# EAGLE board CT_schematic (EAGLE 7.6.0)

Size 100 x 80 mm. Coordinates in mm from the lower left corner, seen from the top.
Outline: 0,0 100,0 100,80 0,80 0,0
Copper layers (1*16): Top 0.035mm / dielectric 1.5mm / Bottom 0.035mm
Design rules "default": minimum track width 10mil, minimum drill 24mil, track to track 8mil, track to pad 8mil, pad to pad 8mil, via to via 8mil, smd to smd 8mil, copper to edge 40mil, drill to drill 8mil, minimum pad ring 10mil, minimum via ring 8mil, stop-mask expansion 4mil, vias tented up to drill 0mil, thermal gap 10mil

## Footprints (pad centres in the part's own frame; a part is rotated, then mirrored left to right if it is on the bottom)
C0603 = smd 0.8 x 0.8: 1 -0.762,0; 2 0.762,0
C0402 = smd 0.5 x 0.5: 1 -0.508,0; 2 0.508,0
C0805 = smd 1.2 x 1.3: 1 -1.016,0; 2 1.016,0
C1206 = smd 1.3 x 1.6: 1 -1.524,0; 2 1.524,0
C1210 = smd 1.2 x 2.5: 1 -1.524,0; 2 1.524,0
EXV-9H = smd 3.505 x 1.676: 1 -2.857,0; 2 2.857,0
L0603 = smd 0.8 x 0.8: 1 -0.762,0; 2 0.762,0
R0603 = smd 0.8 x 0.8: 1 -0.762,0; 2 0.762,0
L1210 = smd 1.2 x 2.5: 1 -1.524,0; 2 1.524,0
WE-HCI_7030/7040/7050 = smd 2.5 x 3: 1 -2.45,0; 2 2.45,0
PJ-037B_PACKAGE = drill 3.7 square: 1 12,0 | drill 3.2 square: 2 6,0
LQFP144 = smd 0.35 x 1.35: 1 -8.75,-10.625; 2 -8.25,-10.625; 3 -7.75,-10.625; 4 -7.25,-10.625; 5 -6.75,-10.625; 6 -6.25,-10.625; 7 -5.75,-10.625; 8 -5.25,-10.625; 9 -4.75,-10.625; 10 -4.25,-10.625; 11 -3.75,-10.625; 12 -3.25,-10.625; 13 -2.75,-10.62; 14 -2.25,-10.625; 15 -1.75,-10.625; 16 -1.25,-10.625; 17 -0.75,-10.625; 18 -0.25,-10.625; 19 0.25,-10.625; 20 0.75,-10.625; 21 1.25,-10.625; 22 1.75,-10.625; 23 2.25,-10.625; 24 2.75,-10.62; 25 3.25,-10.625; 26 3.75,-10.625; 27 4.25,-10.625; 28 4.75,-10.625; 29 5.25,-10.625; 30 5.75,-10.625; 31 6.25,-10.625; 32 6.75,-10.625; 33 7.25,-10.625; 34 7.75,-10.625; 35 8.25,-10.625; 36 8.75,-10.625; 73 8.75,10.625; 74 8.25,10.625; 75 7.75,10.625; 76 7.25,10.625; 77 6.75,10.625; 78 6.25,10.625; 79 5.75,10.625; 80 5.25,10.625; 81 4.75,10.625; 82 4.25,10.625; 83 3.75,10.625; 84 3.25,10.625; 85 2.75,10.625; 86 2.25,10.625; 87 1.75,10.625; 88 1.25,10.625; 89 0.75,10.625; 90 0.25,10.625; 91 -0.25,10.625; 92 -0.75,10.625; 93 -1.25,10.625; 94 -1.75,10.625; 95 -2.25,10.625; 96 -2.75,10.625; 97 -3.25,10.625; 98 -3.75,10.625; 99 -4.25,10.625; 100 -4.75,10.625; 101 -5.25,10.625; 102 -5.75,10.625; 103 -6.25,10.625; 104 -6.75,10.625; 105 -7.25,10.625; 106 -7.75,10.625; 107 -8.25,10.625; 108 -8.75,10.625 | smd 1.35 x 0.35: 37 10.625,-8.75; 38 10.625,-8.25; 39 10.625,-7.75; 40 10.625,-7.25; 41 10.625,-6.75; 42 10.625,-6.25; 43 10.625,-5.75; 44 10.625,-5.25; 45 10.625,-4.75; 46 10.625,-4.25; 47 10.625,-3.75; 48 10.625,-3.25; 49 10.625,-2.75; 50 10.625,-2.25; 51 10.625,-1.75; 52 10.625,-1.25; 53 10.625,-0.75; 54 10.625,-0.25; 55 10.625,0.25; 56 10.625,0.75; 57 10.625,1.25; 58 10.625,1.75; 59 10.625,2.25; 60 10.625,2.75; 61 10.625,3.25; 62 10.625,3.75; 63 10.625,4.25; 64 10.625,4.75; 65 10.625,5.25; 66 10.625,5.75; 67 10.625,6.25; 68 10.625,6.75; 69 10.625,7.25; 70 10.625,7.75; 71 10.625,8.25; 72 10.625,8.75; 109 -10.625,8.75; 110 -10.625,8.25; 111 -10.625,7.75; 112 -10.625,7.25; 113 -10.625,6.75; 114 -10.625,6.25; 115 -10.625,5.75; 116 -10.625,5.25; 117 -10.625,4.75; 118 -10.625,4.25; 119 -10.625,3.75; 120 -10.625,3.25; 121 -10.625,2.75; 122 -10.625,2.25; 123 -10.625,1.75; 124 -10.625,1.25; 125 -10.625,0.75; 126 -10.625,0.25; 127 -10.625,-0.25; 128 -10.625,-0.75; 129 -10.625,-1.25; 130 -10.625,-1.75; 131 -10.625,-2.25; 132 -10.625,-2.75; 133 -10.625,-3.25; 134 -10.625,-3.75; 135 -10.625,-4.25; 136 -10.625,-4.75; 137 -10.625,-5.25; 138 -10.625,-5.75; 139 -10.625,-6.25; 140 -10.625,-6.75; 141 -10.625,-7.25; 142 -10.625,-7.75; 143 -10.625,-8.25; 144 -10.625,-8.75
A2500R24A00GM = smd 1.5 x 0.61: 1 -3,7; 2 -3,6; 3 -3,5; 4 -3,4; 5 -3,3; 6 -3,2; 7 -3,1; 8 -3,0; 17 5.22,0; 18 5.22,1; 19 5.22,2; 20 5.22,3; 21 5.22,4; 22 5.22,5; 23 5.22,6; 24 5.22,7 | smd 0.61 x 1.5: 9 -2.39,-1.6; 10 -1.39,-1.6; 11 -0.39,-1.6; 12 0.61,-1.6; 13 1.61,-1.6; 14 2.61,-1.6; 15 3.61,-1.6; 16 4.61,-1.6 | smd 1 x 1: 25 -2.8,9; 26 -2.8,13; 27 5.02,9; 28 5.02,13; 29 0.11,5.75; 30 2.11,5.75
QFN-32 = smd 0.6 x 0.3: 1 -2.3,1.75; 2 -2.3,1.25; 3 -2.3,0.75; 4 -2.3,0.25; 5 -2.3,-0.25; 6 -2.3,-0.75; 7 -2.3,-1.25; 8 -2.3,-1.75; 17 2.3,-1.75; 18 2.3,-1.25; 19 2.3,-0.75; 20 2.3,-0.25; 21 2.3,0.25; 22 2.3,0.75; 23 2.3,1.25; 24 2.3,1.75 | smd 0.3 x 0.6: 9 -1.75,-2.3; 10 -1.25,-2.3; 11 -0.75,-2.3; 12 -0.25,-2.3; 13 0.25,-2.3; 14 0.75,-2.3; 15 1.25,-2.3; 16 1.75,-2.3; 25 1.75,2.3; 26 1.25,2.3; 27 0.75,2.3; 28 0.25,2.3; 29 -0.25,2.3; 30 -0.75,2.3; 31 -1.25,2.3; 32 -1.75,2.3 | smd 3.2 x 3.2: EXP 0,0
7498011122R = smd 0.71 x 2.29: 1 -3.545,-3.18; 2 -2.525,-3.18; 3 -1.505,-3.18; 4 -0.485,-3.18; 5 0.535,-3.18; 6 1.555,-3.18; 8 3.595,-3.18; 9 5.635,-3.18; 10 6.655,-3.18; 11 -6.605,-3.18; 12 -5.585,-3.18 | smd 1.4 x 2.54: 13 -8.51,10.2; 14 8.51,10.2 | hole 1.4: -3.5,0; 3.5,0
AT24C02D = smd 1.6 x 0.6: 1 -2.475,1.905 | smd 1.55 x 0.6: 2 -2.475,0.635; 3 -2.475,-0.635; 4 -2.475,-1.905; 5 2.475,-1.905; 6 2.475,-0.635; 7 2.475,0.635; 8 2.475,1.905
SSOP-20 = smd 1.651 x 0.432: 1 -3.48,2.925; 2 -3.48,2.275; 3 -3.48,1.625; 4 -3.48,0.975; 5 -3.48,0.325; 6 -3.48,-0.325; 7 -3.48,-0.975; 8 -3.48,-1.625; 9 -3.48,-2.275; 10 -3.48,-2.925; 11 3.48,-2.925; 12 3.48,-2.275; 13 3.48,-1.625; 14 3.48,-0.975; 15 3.48,-0.325; 16 3.48,0.325; 17 3.48,0.975; 18 3.48,1.625; 19 3.48,2.275; 20 3.48,2.925
182-009-MALE = drill 1.194 pad 1.524 octagon: 1 -5.537,10.923; 2 -2.769,10.923; 3 0,10.923; 4 2.769,10.923; 5 5.537,10.923; 6 -4.153,8.08; 7 -1.384,8.08; 8 1.384,8.08; 9 4.153,8.08 | hole 3.048: -12.446,9.501; 12.446,9.501
SJ-43515TS-SMT-TR = smd 2.2 x 3: 1 0.6,-7.4; 4 3.4,-7.4 | smd 3 x 3: 2 12.8,-7.4; 5 17,-3 | smd 2 x 3: 3 5.3,0; 6 2.5,0 | drill 1.8: P$7 4.5,-3.69; P$8 11.54,-3.69
WM-64PC = drill 0.6 pad 1: 1 -1,0.95; 2 -1,-0.95
ABS07-32.768KHZ-7-T = smd 1.1 x 2.4: 1 -2.5,0; 2 0,0
ABLS-25.000MHZ-B2F-T = smd 5.6 x 2.8: 1 -3.81,0; 2 5.69,0
ASFL1 = smd 1.7 x 1.5: 1 -1.27,-1.1; 2 1.27,-1.1; 3 1.27,1.1; 4 -1.27,1.1
WSON-8 = smd 0.3 x 0.6: 1 -0.75,0; 2 0.05,0; 3 0.85,0; 4 1.65,0; 5 1.65,3.8; 6 0.85,3.8; 7 0.05,3.8; 8 -0.75,3.8 | smd 3 x 2.6: PAD 0.45,1.9
HTSSOP14 = smd 1.676 x 0.356: 1 -2.8,1.95; 2 -2.8,1.3; 3 -2.8,0.65; 4 -2.8,0; 5 -2.8,-0.65; 6 -2.8,-1.3; 7 -2.8,-1.95; 8 2.8,-1.95; 9 2.8,-1.3; 10 2.8,-0.65; 11 2.8,0; 12 2.8,0.65; 13 2.8,1.3; 14 2.8,1.95 | smd 3 x 5: 15 0,0 | drill 0.4 pad 0.45: P$1 -0.75,1.5; P$2 0.75,1.5; P$3 -0.75,0; P$4 0.8,0; P$5 -0.75,-1.5; P$6 0.9,-1.5
SON-6 = smd 0.55 x 0.3: 1 -0.355,0.5 | smd 0.52 x 0.3: 2 -0.37,0; 3 -0.37,-0.5; 4 0.37,-0.5; 5 0.37,0; 6 0.37,0.5
SW_4-1437565-2 = smd 1.4 x 2.1: 1 -2.23,4.55; 2 -2.23,-4.55; 3 2.23,4.55; 4 2.23,-4.55
LGM67K-G1J2-24-Z = smd 0.8 x 1.4: A -2,0; C 0,0
NC7SZ125M5X = smd 1.3 x 0.7: 1 -1.3,0.95; 2 -1.3,0; 3 -1.3,-0.95; 4 1.3,-0.95; 5 1.3,0.95

## Placement (x,y rotation side)
C1  1e-06  [C0603]  -15.24,107.95 0 top  (outside the outline)
C2  1e-07  [C0603]  -19.05,107.95 0 top  (outside the outline)
C3  1e-07  [C0603]  -22.86,107.95 0 top  (outside the outline)
C4  1e-07  [C0603]  -26.67,107.95 0 top  (outside the outline)
C5  1e-07  [C0603]  -30.48,107.95 0 top  (outside the outline)
C6  1e-07  [C0603]  -34.29,107.95 0 top  (outside the outline)
C7  1e-07  [C0603]  -38.1,107.95 0 top  (outside the outline)
C8  1e-07  [C0603]  -41.91,107.95 0 top  (outside the outline)
C9  1e-07  [C0603]  -45.72,107.95 0 top  (outside the outline)
C10  1e-07  [C0603]  -49.53,107.95 0 top  (outside the outline)
C11  1e-07  [C0603]  -53.34,107.95 0 top  (outside the outline)
C12  1e-07  [C0603]  -57.15,107.95 0 top  (outside the outline)
C13  1e-07  [C0603]  -60.96,107.95 0 top  (outside the outline)
C14  4.7e-06  [C0603]  -90.17,102.87 0 top  (outside the outline)
C15  2.2e-06  [C0603]  -93.98,102.87 0 top  (outside the outline)
C16  2.2e-06  [C0603]  -97.79,102.87 0 top  (outside the outline)
C17  1e-08  [C0603]  -64.77,107.95 0 top  (outside the outline)
C18  1e-06  [C0603]  -68.58,107.95 0 top  (outside the outline)
C19  1e-11  [C0402]  -46.99,118.11 0 top  (outside the outline)
C20  1e-11  [C0402]  -50.8,118.11 0 top  (outside the outline)
C21  1e-11  [C0402]  -54.61,118.11 0 top  (outside the outline)
C22  1e-11  [C0402]  -58.42,118.11 0 top  (outside the outline)
C23  1e-05  [C0805]  -27.94,96.52 0 top  (outside the outline)
C24  2.2e-08  [C0402]  -39.37,118.11 0 top  (outside the outline)
C25  1e-06  [C0603]  -72.39,107.95 0 top  (outside the outline)
C26  1e-06  [C0603]  -76.2,107.95 0 top  (outside the outline)
C27  4.7e-10  [C0603]  -101.6,102.87 0 top  (outside the outline)
C28  1e-06  [C0603]  -80.01,107.95 0 top  (outside the outline)
C29  1e-11  [C0402]  -62.23,118.11 0 top  (outside the outline)
C30  1e-11  [C0402]  -66.04,118.11 0 top  (outside the outline)
C31  1e-08  [C0402]  -69.85,118.11 0 top  (outside the outline)
C32  1e-06  [C0603]  -83.82,107.95 0 top  (outside the outline)
C33  1e-06  [C0603]  -87.63,107.95 0 top  (outside the outline)
C34  1e-06  [C0603]  -91.44,107.95 0 top  (outside the outline)
C35  4.7e-06  [C0805]  -33.02,96.52 0 top  (outside the outline)
C36  1e-06  [C0603]  -95.25,107.95 0 top  (outside the outline)
C37  1e-06  [C0603]  -99.06,107.95 0 top  (outside the outline)
C38  1e-06  [C0603]  -15.24,113.03 0 top  (outside the outline)
C39  1e-06  [C0603]  -19.05,113.03 0 top  (outside the outline)
C40  1e-06  [C0603]  -22.86,113.03 0 top  (outside the outline)
C41  1e-06  [C0603]  -26.67,113.03 0 top  (outside the outline)
C42  1e-06  [C0603]  -30.48,113.03 0 top  (outside the outline)
C43  1e-07  [C0402]  -73.66,118.11 0 top  (outside the outline)
C44  1e-07  [C0402]  -77.47,118.11 0 top  (outside the outline)
C45  1e-07  [C0402]  -81.28,118.11 0 top  (outside the outline)
C46  1e-07  [C0402]  -85.09,118.11 0 top  (outside the outline)
C47  1e-06  [C0603]  -34.29,113.03 0 top  (outside the outline)
C48  1e-08  [C0402]  -88.9,118.11 0 top  (outside the outline)
C49  1e-08  [C0402]  -92.71,118.11 0 top  (outside the outline)
C50  1e-05  [C1206]  -97.79,88.9 0 top  (outside the outline)
C51  1e-05  [C0805]  -38.1,96.52 0 top  (outside the outline)
C52  1e-06  [C0603]  -38.1,113.03 0 top  (outside the outline)
C53  3.3e-09  [C0402]  -43.18,118.11 0 top  (outside the outline)
C54  1e-07  [C0402]  -96.52,118.11 0 top  (outside the outline)
C55  2.2e-05  [C1210]  -78.74,90.17 0 top  (outside the outline)
C56  2.2e-05  [C1210]  -85.09,90.17 0 top  (outside the outline)
C57  1e-05  [C0805]  -43.18,96.52 0 top  (outside the outline)
C58  1e-05  [C0805]  -48.26,96.52 0 top  (outside the outline)
C59  1e-07  [C0402]  -100.33,118.11 0 top  (outside the outline)
C60  0.0001  [EXV-9H]  -57.15,81.28 0 top  (outside the outline)
C61  0.0001  [EXV-9H]  -68.58,81.28 0 top  (outside the outline)
C62  1e-08  [C0402]  -15.24,123.19 0 top  (outside the outline)
C63  1e-08  [C0402]  -19.05,123.19 0 top  (outside the outline)
F1  240.0  [L0603]  -41.91,113.03 0 top  (outside the outline)
I1  97.0  [R0603]  -45.72,113.03 0 top  (outside the outline)
I5  1.5e-05  [L1210]  -91.44,90.17 0 top  (outside the outline)
I6  3.3e-06  [WE-HCI_7030/7040/7050]  -88.9,55.88 0 top  (outside the outline)
J1  PJ-037B  [PJ-037B_PACKAGE]  -83.82,57.15 0 top  (outside the outline)
R2  1000.0  [R0603]  -49.53,113.03 0 top  (outside the outline)
R4  4700.0  [R0603]  -53.34,113.03 0 top  (outside the outline)
R5  4700.0  [R0603]  -57.15,113.03 0 top  (outside the outline)
R6  2200.0  [R0603]  -60.96,113.03 0 top  (outside the outline)
R7  2200.0  [R0603]  -64.77,113.03 0 top  (outside the outline)
R8  2200.0  [R0603]  -68.58,113.03 0 top  (outside the outline)
R9  2200.0  [R0603]  -72.39,113.03 0 top  (outside the outline)
R10  10000.0  [R0603]  -92.71,96.52 0 top  (outside the outline)
R11  0.1  [R0603]  -76.2,113.03 0 top  (outside the outline)
R12  0.1  [R0603]  -80.01,113.03 0 top  (outside the outline)
R13  200.0  [R0603]  -83.82,113.03 0 top  (outside the outline)
R14  200.0  [R0603]  -87.63,113.03 0 top  (outside the outline)
R15  12100.0  [R0603]  -97.79,96.52 0 top  (outside the outline)
R16  49.9  [R0603]  -91.44,113.03 0 top  (outside the outline)
R17  49.9  [R0603]  -95.25,113.03 0 top  (outside the outline)
R18  49.9  [R0603]  -99.06,113.03 0 top  (outside the outline)
R19  10000.0  [R0603]  -15.24,102.87 0 top  (outside the outline)
R20  49.9  [R0603]  -15.24,118.11 0 top  (outside the outline)
R21  10000.0  [R0603]  -20.32,102.87 0 top  (outside the outline)
R22  10000.0  [R0603]  -25.4,102.87 0 top  (outside the outline)
R23  10000.0  [R0603]  -30.48,102.87 0 top  (outside the outline)
R24  10000.0  [R0603]  -35.56,102.87 0 top  (outside the outline)
R25  10000.0  [R0603]  -40.64,102.87 0 top  (outside the outline)
R26  10000.0  [R0603]  -45.72,102.87 0 top  (outside the outline)
R27  10000.0  [R0603]  -50.8,102.87 0 top  (outside the outline)
R28  10000.0  [R0603]  -55.88,102.87 0 top  (outside the outline)
R29  10000.0  [R0603]  -60.96,102.87 0 top  (outside the outline)
R30  10000.0  [R0603]  -66.04,102.87 0 top  (outside the outline)
R31  10000.0  [R0603]  -71.12,102.87 0 top  (outside the outline)
R32  100000.0  [R0603]  -62.23,96.52 0 top  (outside the outline)
R33  100000.0  [R0603]  -67.31,96.52 0 top  (outside the outline)
R34  100000.0  [R0603]  -72.39,96.52 0 top  (outside the outline)
R35  1270.0  [R0603]  -19.05,118.11 0 top  (outside the outline)
R36  1270.0  [R0603]  -22.86,118.11 0 top  (outside the outline)
R37  100000.0  [R0603]  -77.47,96.52 0 top  (outside the outline)
R38  200.0  [R0603]  -26.67,118.11 0 top  (outside the outline)
R39  1000.0  [R0603]  -30.48,118.11 0 top  (outside the outline)
R40  71007.101651032  [R0603]  -57.15,96.52 0 top  (outside the outline)
R41  22000.0  [R0603]  -76.2,102.87 0 top  (outside the outline)
R42  10000.0  [R0603]  -81.28,102.87 0 top  (outside the outline)
R43  10000.0  [R0603]  -86.36,102.87 0 top  (outside the outline)
R44  9100.0  [R0603]  -34.29,118.11 0 top  (outside the outline)
R45  680000.0  [R0603]  -82.55,96.52 0 top  (outside the outline)
R46  120000.0  [R0603]  -87.63,96.52 0 top  (outside the outline)
U1  STM32F207ZET6  [LQFP144]  -64.77,11.43 0 top  (outside the outline)
U2  A2500R24A00GM  [A2500R24A00GM]  -46.99,7.62 0 top  (outside the outline)
U3  LAN8710AI-EZK  [QFN-32]  -67.31,69.85 0 top  (outside the outline)
U4  7498011122R  [7498011122R]  -22.86,7.62 0 top  (outside the outline)
U5  AT24C02D-SSHM-T  [AT24C02D]  -85.09,69.85 0 top  (outside the outline)
U6  MAX3218EAP+T  [SSOP-20]  -95.25,68.58 0 top  (outside the outline)
U7  182-009-113R531  [182-009-MALE]  -36.83,34.29 0 top  (outside the outline)
U8  SGTL5000XNAA3  [QFN-32]  -53.34,69.85 0 top  (outside the outline)
U9  SJ-43515TS-SMT-TR  [SJ-43515TS-SMT-TR]  -78.74,38.1 0 top  (outside the outline)
U10  SJ-43515TS-SMT-TR  [SJ-43515TS-SMT-TR]  -39.37,59.69 0 top  (outside the outline)
U11  SJ-43515TS-SMT-TR  [SJ-43515TS-SMT-TR]  -67.31,59.69 0 top  (outside the outline)
U12  WM-64PCT  [WM-64PC]  -39.37,69.85 0 top  (outside the outline)
U13  ABS07-32.768KHZ-7-T  [ABS07-32.768KHZ-7-T]  -49.53,90.17 0 top  (outside the outline)
U14  ABLS-25.000MHZ-B2F-T  [ABLS-25.000MHZ-B2F-T]  -87.63,81.28 0 top  (outside the outline)
U15  ABLS-25.000MHZ-B2F-T  [ABLS-25.000MHZ-B2F-T]  -26.67,90.17 0 top  (outside the outline)
U16  ASFL-24.57MHZ-NCS  [ASFL1]  -48.26,81.28 0 top  (outside the outline)
U17  LP3878SDX-ADJ/NOPB  [WSON-8]  -30.48,80.01 0 top  (outside the outline)
U18  tps54325PWP  [HTSSOP14]  -58.42,90.17 0 top  (outside the outline)
U19  TPS3895ADRYR  [SON-6]  -21.59,121.92 0 top  (outside the outline)
U20  4-1437565-2  [SW_4-1437565-2]  -27.94,71.12 0 top  (outside the outline)
U21  Q65110A2395  [LGM67K-G1J2-24-Z]  -67.31,90.17 0 top  (outside the outline)
U22  nc7sz125m5x  [NC7SZ125M5X]  -15.24,96.52 0 top  (outside the outline)
U23  nc7sz125m5x  [NC7SZ125M5X]  -21.59,96.52 0 top  (outside the outline)

## Library data of the parts
C1-C63 F1 I1 I5 I6 J1 R2 R4-R46 U1-U23 = circuit_tree

## Nets
CLK_CRYSTAL_U1_8: C19.1 U1.8 U13.1
CLK_CRYSTAL_U1_9: C20.1 U1.9 U13.2
CLK_CRYSTAL_U1_23: C21.1 U1.23 U14.1
CLK_CRYSTAL_U1_24: C22.1 U1.24 U14.2
CLK_CRYSTAL_U3_4: C30.1 U3.4 U15.2
CLK_CRYSTAL_U3_5: C29.1 U3.5 U15.1
CLK_U8_21: U8.21 U16.3
GND: C1.2 C2.2 C3.2 C4.2 C5.2 C6.2 C7.2 C8.2 C9.2 C10.2 C11.2 C12.2 C13.2 C14.2 C15.2 C16.2 C17.2 C18.2 C19.2 C20.2 C21.2 C22.2 C23.2 C24.2 C25.2 C26.2 C27.2 C28.2 C29.2 C30.2 C31.2 C32.2 C33.2 C34.2 C43.2 C44.2 C45.2 C46.2 C47.2 C48.2 C49.2 C50.2 C51.2 C52.2 C53.2 C55.2 C56.2 C57.2 C58.2 C59.2 C60.2 C61.2 C62.2 C63.2 J1.2 R2.2 R10.2 R11.2 R12.2 R13.2 R15.2 R26.2 R27.2 R28.2 R30.2 R31.2 R36.2 R39.2 R41.2 R44.2 R46.2 U1.16 U1.31 U1.38 U1.51 U1.61 U1.83 U1.94 U1.107 U1.120 U1.130 U2.8 U2.17 U3.EXP U5.4 U6.5 U6.17 U6.20 U7.5 U8.1 U8.3 U8.7 U8.EXP U10.1 U11.1 U12.2 U16.2 U17.3 U17.PAD U18.5 U18.8 U18.9 U18.15 U19.2 U21.C U22.1 U22.3 U23.1 U23.3
NET_U1_25: R5.1 U1.25 U23.4
NET_U1_27: R8.1 U1.27 U3.17
NET_U1_33: C17.1 C18.1 F1.1 U1.32 U1.33
NET_U1_36: R9.1 U1.36 U3.16
NET_U1_71: C15.1 U1.71
NET_U1_106: C16.1 U1.106
NET_U1_136: R6.1 U1.136 U5.6
NET_U1_137: R7.1 U1.137 U5.5
NET_U1_138: R10.1 U1.138
NET_U1_141: U21.A
NET_U1_142: U20.3 U20.4
NET_U3_1: C25.1 I1.1 R16.2 R17.2 R18.2 R20.2 R21.2 U3.1 U3.27 U4.2 U4.9
NET_U3_3: R21.1 U3.3
NET_U3_18: R19.1 U3.18
NET_U3_19: R4.1 U3.19 U22.4
NET_U3_32: R15.1 U3.32
NET_U4_1: R16.1 U3.29 U4.1
NET_U4_3: R14.2 R17.1 U3.28 U4.3
NET_U4_4: R18.1 U3.31 U4.4
NET_U4_5: C24.1 U4.2 U4.5
NET_U4_6: R20.1 U3.30 U4.6
NET_U4_8: R12.1 U4.8
NET_U4_10: R14.1 U4.10
NET_U4_11: U3.2 U4.11
NET_U4_12: R13.1 U4.12
NET_U4_13: R11.1 U4.13 U4.14
NET_U5_1: R29.1 U5.1
NET_U5_2: R30.1 U5.2
NET_U5_3: R31.1 U5.3
NET_U5_7: R28.1 U5.7
NET_U6_1: I5.1 U6.1
NET_U6_2: R32.1 U6.2
NET_U6_3: R33.1 U6.3
NET_U6_4: R34.1 U6.4
NET_U6_15: C34.1 U6.15
NET_U6_16: C35.2 U6.16
NET_U6_18: C35.1 U6.18
NET_U6_19: C33.1 U6.19
NET_U7_2: U6.12 U7.2
NET_U7_3: U6.14 U7.3
NET_U7_7: U6.11 U7.7
NET_U7_8: U6.13 U7.8
NET_U8_10: C46.1 U8.10
NET_U8_29: R35.1 U8.29
NET_U8_31: R36.1 U8.31
NET_U9_1: U8.4 U9.1
NET_U9_2: U8.2 U9.2
NET_U9_5: U8.6 U9.5
NET_U10_2: C37.1 U10.2
NET_U10_5: C36.1 U10.5
NET_U10_11: C37.2
NET_U10_12: C36.2
NET_U11_2: C39.1 C40.1 U11.2
NET_U11_5: C38.1 U11.5
NET_U11_13: C39.2 C40.2
NET_U11_14: C38.2
NET_U12_1: C41.1 C42.1 C47.1 U8.16 U12.1
NET_U12_15: C41.2 C42.2
NET_U17_1: C49.1 U17.1
NET_U17_6: R38.2 R39.1 U17.6
NET_U17_8: R37.1 U17.8
NET_U18_2: R40.2 R41.1 U18.2
NET_U18_3: C52.1 U18.3
NET_U18_4: C53.1 U18.4
NET_U18_10: C54.1 I6.1 U18.10 U18.11
NET_U18_12: C54.2 U18.12
NET_U19_1: R43.1 R44.1 U19.1
NET_U19_3: R45.2 R46.1 U19.3
NET_U19_4: R42.1 U19.4 U22.2 U23.2
NET_U20_1: R2.1 U20.1 U20.2
PROC_ETH_COL: R24.1 U1.37 U3.15
PROC_ETH_CRS: U1.34 U3.14
PROC_ETH_RX_CLK: R26.1 U1.35 U3.7
PROC_ETH_RX_DV: U1.43 U3.26
PROC_ETH_RX_ER: R25.1 U1.69 U3.13
PROC_ETH_RXD0: R22.1 U1.44 U3.11
PROC_ETH_RXD1: R23.1 U1.45 U3.10
PROC_ETH_RXD2: U1.46 U3.9
PROC_ETH_RXD3: R27.1 U1.47 U3.8
PROC_ETH_TX_CLK: U1.29 U3.20
PROC_ETH_TX_EN: U1.70 U3.21
PROC_ETH_TXD0: U1.73 U3.22
PROC_ETH_TXD1: U1.129 U3.23
PROC_ETH_TXD2: U1.28 U3.24
PROC_ETH_TXD3: U1.1 U3.25
PROC_I2S2_SCK: U1.74 U8.24
PROC_I2S2_SD: U1.76 U8.26
PROC_I2S2_WS: U1.140 U8.23
PROC_SPI1_MISO: U1.42 U2.10
PROC_SPI1_MOSI: U1.135 U2.11
PROC_SPI1_NSS: U1.40 U2.12
PROC_SPI1_SCK: U1.41 U2.9
PROC_UART4_RX: U1.112 U6.9
PROC_UART4_TX: U1.111 U6.7
VCC_S1_6V1: C50.1 C57.1 C58.1 C60.1 C61.1 J1.1 R37.2 U17.4 U18.7 U18.13 U18.14
VCC_TIER1_1V2: C26.1 C27.1 C43.1 C51.1 R38.1 U3.6 U8.30 U17.5
VCC_TIER1_3V3: C1.1 C2.1 C3.1 C4.1 C5.1 C6.1 C7.1 C8.1 C9.1 C10.1 C11.1 C12.1 C13.1 C14.1 C23.1 C28.1 C31.1 C32.1 C44.1 C45.1 C48.1 C55.1 C56.1 C59.1 C62.1 C63.1 F1.2 I1.2 I5.2 I6.2 R4.2 R5.2 R6.2 R7.2 R8.2 R9.2 R19.2 R22.2 R23.2 R24.2 R25.2 R29.2 R32.2 R33.2 R34.2 R35.2 R40.1 R42.2 R43.2 R45.1 U1.6 U1.17 U1.30 U1.39 U1.52 U1.62 U1.72 U1.84 U1.95 U1.108 U1.121 U1.131 U1.144 U2.18 U3.12 U5.8 U6.6 U8.5 U8.20 U16.4 U18.1 U19.6 U22.5 U23.5

## Tracks (layer width: path | path; a pad name or v marks a point on that pad's centre or on a via)
CLK_CRYSTAL_U1_8  (2 unrouted)
CLK_CRYSTAL_U1_9  (2 unrouted)
CLK_CRYSTAL_U1_23  (2 unrouted)
CLK_CRYSTAL_U1_24  (2 unrouted)
CLK_CRYSTAL_U3_4  (2 unrouted)
CLK_CRYSTAL_U3_5  (2 unrouted)
CLK_U8_21  (1 unrouted)
GND  (108 unrouted)
NET_U1_25  (2 unrouted)
NET_U1_27  (2 unrouted)
NET_U1_33  (4 unrouted)
NET_U1_36  (2 unrouted)
NET_U1_71  (1 unrouted)
NET_U1_106  (1 unrouted)
NET_U1_136  (2 unrouted)
NET_U1_137  (2 unrouted)
NET_U1_138  (1 unrouted)
NET_U1_142  (1 unrouted)
NET_U3_1  (10 unrouted)
NET_U3_3  (1 unrouted)
NET_U3_18  (1 unrouted)
NET_U3_19  (2 unrouted)
NET_U3_32  (1 unrouted)
NET_U4_1  (2 unrouted)
NET_U4_3  (3 unrouted)
NET_U4_4  (2 unrouted)
NET_U4_5  (2 unrouted)
NET_U4_6  (2 unrouted)
NET_U4_8  (1 unrouted)
NET_U4_10  (1 unrouted)
NET_U4_11  (1 unrouted)
NET_U4_12  (1 unrouted)
NET_U4_13  (2 unrouted)
NET_U5_1  (1 unrouted)
NET_U5_2  (1 unrouted)
NET_U5_3  (1 unrouted)
NET_U5_7  (1 unrouted)
NET_U6_1  (1 unrouted)
NET_U6_2  (1 unrouted)
NET_U6_3  (1 unrouted)
NET_U6_4  (1 unrouted)
NET_U6_15  (1 unrouted)
NET_U6_16  (1 unrouted)
NET_U6_18  (1 unrouted)
NET_U6_19  (1 unrouted)
NET_U7_2  (1 unrouted)
NET_U7_3  (1 unrouted)
NET_U7_7  (1 unrouted)
NET_U7_8  (1 unrouted)
NET_U8_10  (1 unrouted)
NET_U8_29  (1 unrouted)
NET_U8_31  (1 unrouted)
NET_U9_1  (1 unrouted)
NET_U9_2  (1 unrouted)
NET_U9_5  (1 unrouted)
NET_U10_2  (1 unrouted)
NET_U10_5  (1 unrouted)
NET_U11_2  (2 unrouted)
NET_U11_5  (1 unrouted)
NET_U11_13  (1 unrouted)
NET_U12_1  (4 unrouted)
NET_U12_15  (1 unrouted)
NET_U17_1  (1 unrouted)
NET_U17_6  (2 unrouted)
NET_U17_8  (1 unrouted)
NET_U18_2  (2 unrouted)
NET_U18_3  (1 unrouted)
NET_U18_4  (1 unrouted)
NET_U18_10  (3 unrouted)
NET_U18_12  (1 unrouted)
NET_U19_1  (2 unrouted)
NET_U19_3  (2 unrouted)
NET_U19_4  (3 unrouted)
NET_U20_1  (2 unrouted)
PROC_ETH_COL  (2 unrouted)
PROC_ETH_CRS  (1 unrouted)
PROC_ETH_RX_CLK  (2 unrouted)
PROC_ETH_RX_DV  (1 unrouted)
PROC_ETH_RX_ER  (2 unrouted)
PROC_ETH_RXD0  (2 unrouted)
PROC_ETH_RXD1  (2 unrouted)
PROC_ETH_RXD2  (1 unrouted)
PROC_ETH_RXD3  (2 unrouted)
PROC_ETH_TX_CLK  (1 unrouted)
PROC_ETH_TX_EN  (1 unrouted)
PROC_ETH_TXD0  (1 unrouted)
PROC_ETH_TXD1  (1 unrouted)
PROC_ETH_TXD2  (1 unrouted)
PROC_ETH_TXD3  (1 unrouted)
PROC_I2S2_SCK  (1 unrouted)
PROC_I2S2_SD  (1 unrouted)
PROC_I2S2_WS  (1 unrouted)
PROC_SPI1_MISO  (1 unrouted)
PROC_SPI1_MOSI  (1 unrouted)
PROC_SPI1_NSS  (1 unrouted)
PROC_SPI1_SCK  (1 unrouted)
PROC_UART4_RX  (1 unrouted)
PROC_UART4_TX  (1 unrouted)
VCC_S1_6V1  (10 unrouted)
VCC_TIER1_1V2  (7 unrouted)
VCC_TIER1_3V3  (73 unrouted)